# Altium PCB PCB1.PcbDoc
Units mil, origin at the board's own origin, x right, y up, seen from the top; angles counter-clockwise.
Board outline 2920.03 x 2075.03 mil, 2 copper layers (Top Layer, Bottom Layer); 23 components, 18 nets, 100 pads, 6 vias.
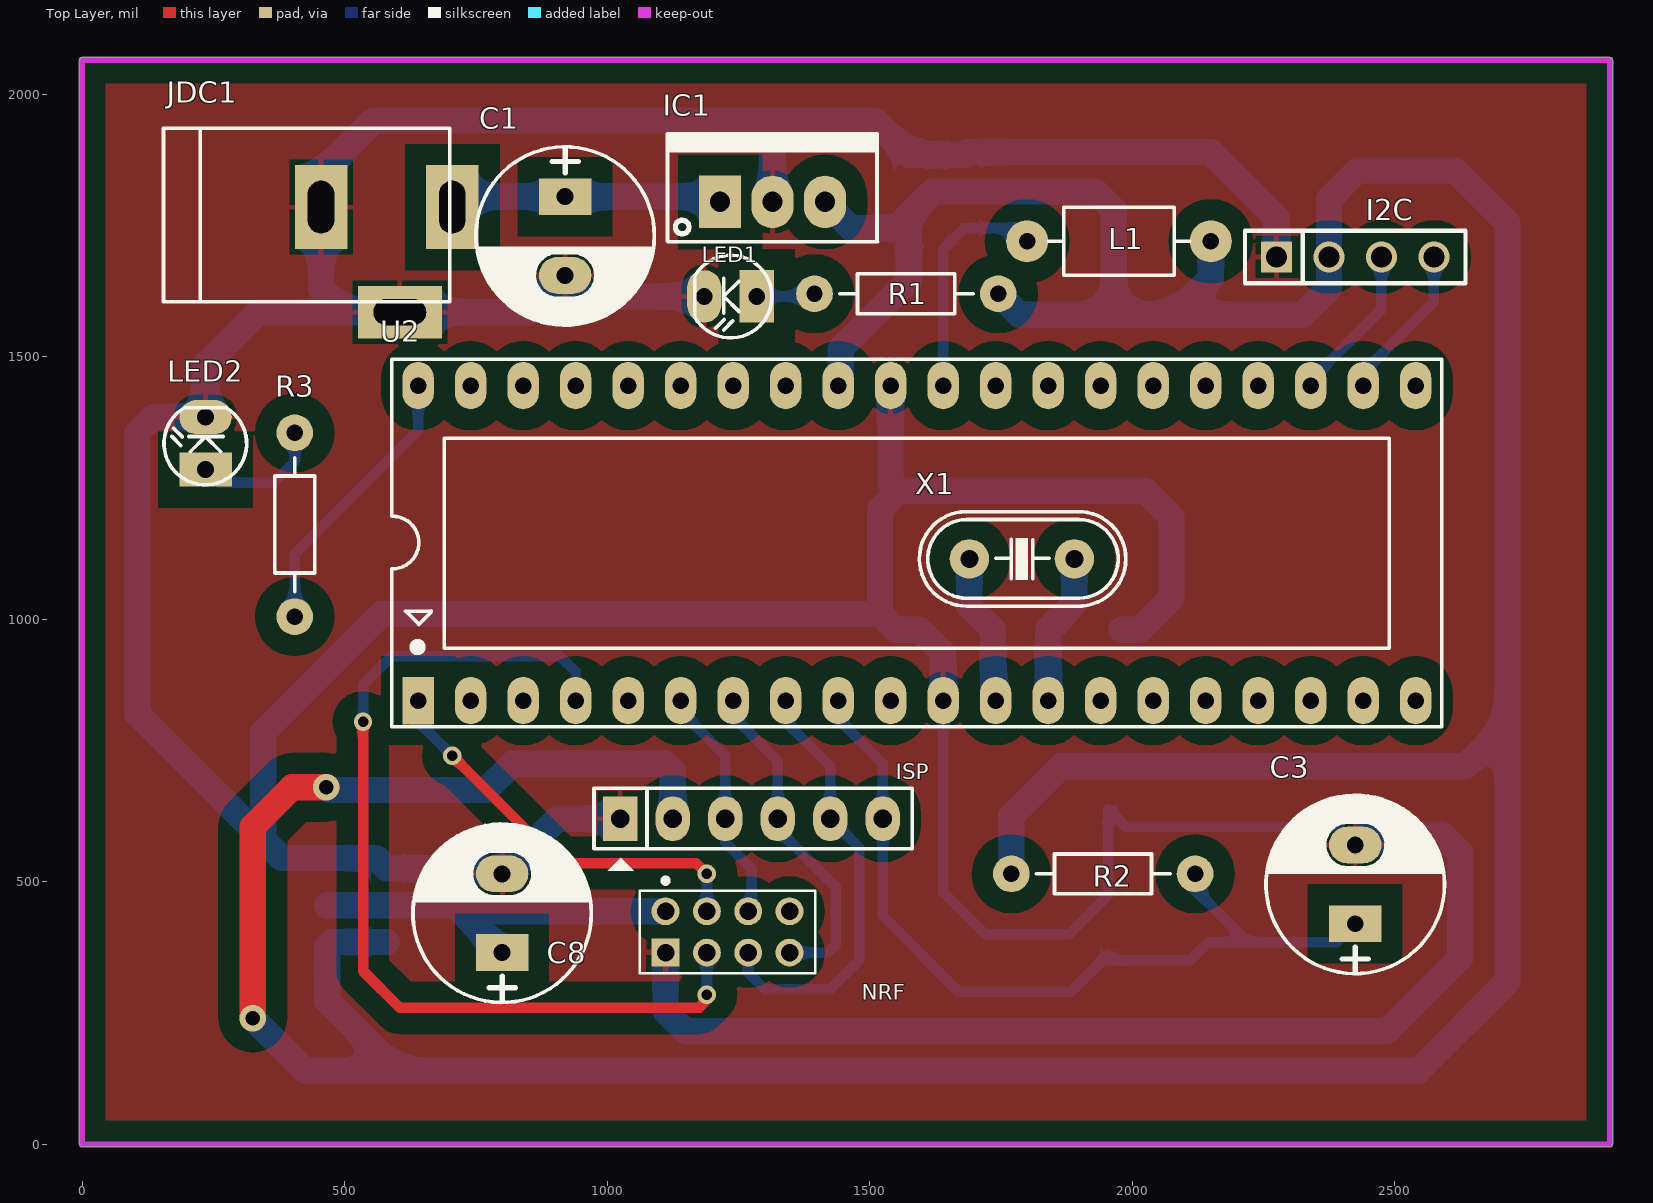
[diagram p0: Top Layer view]
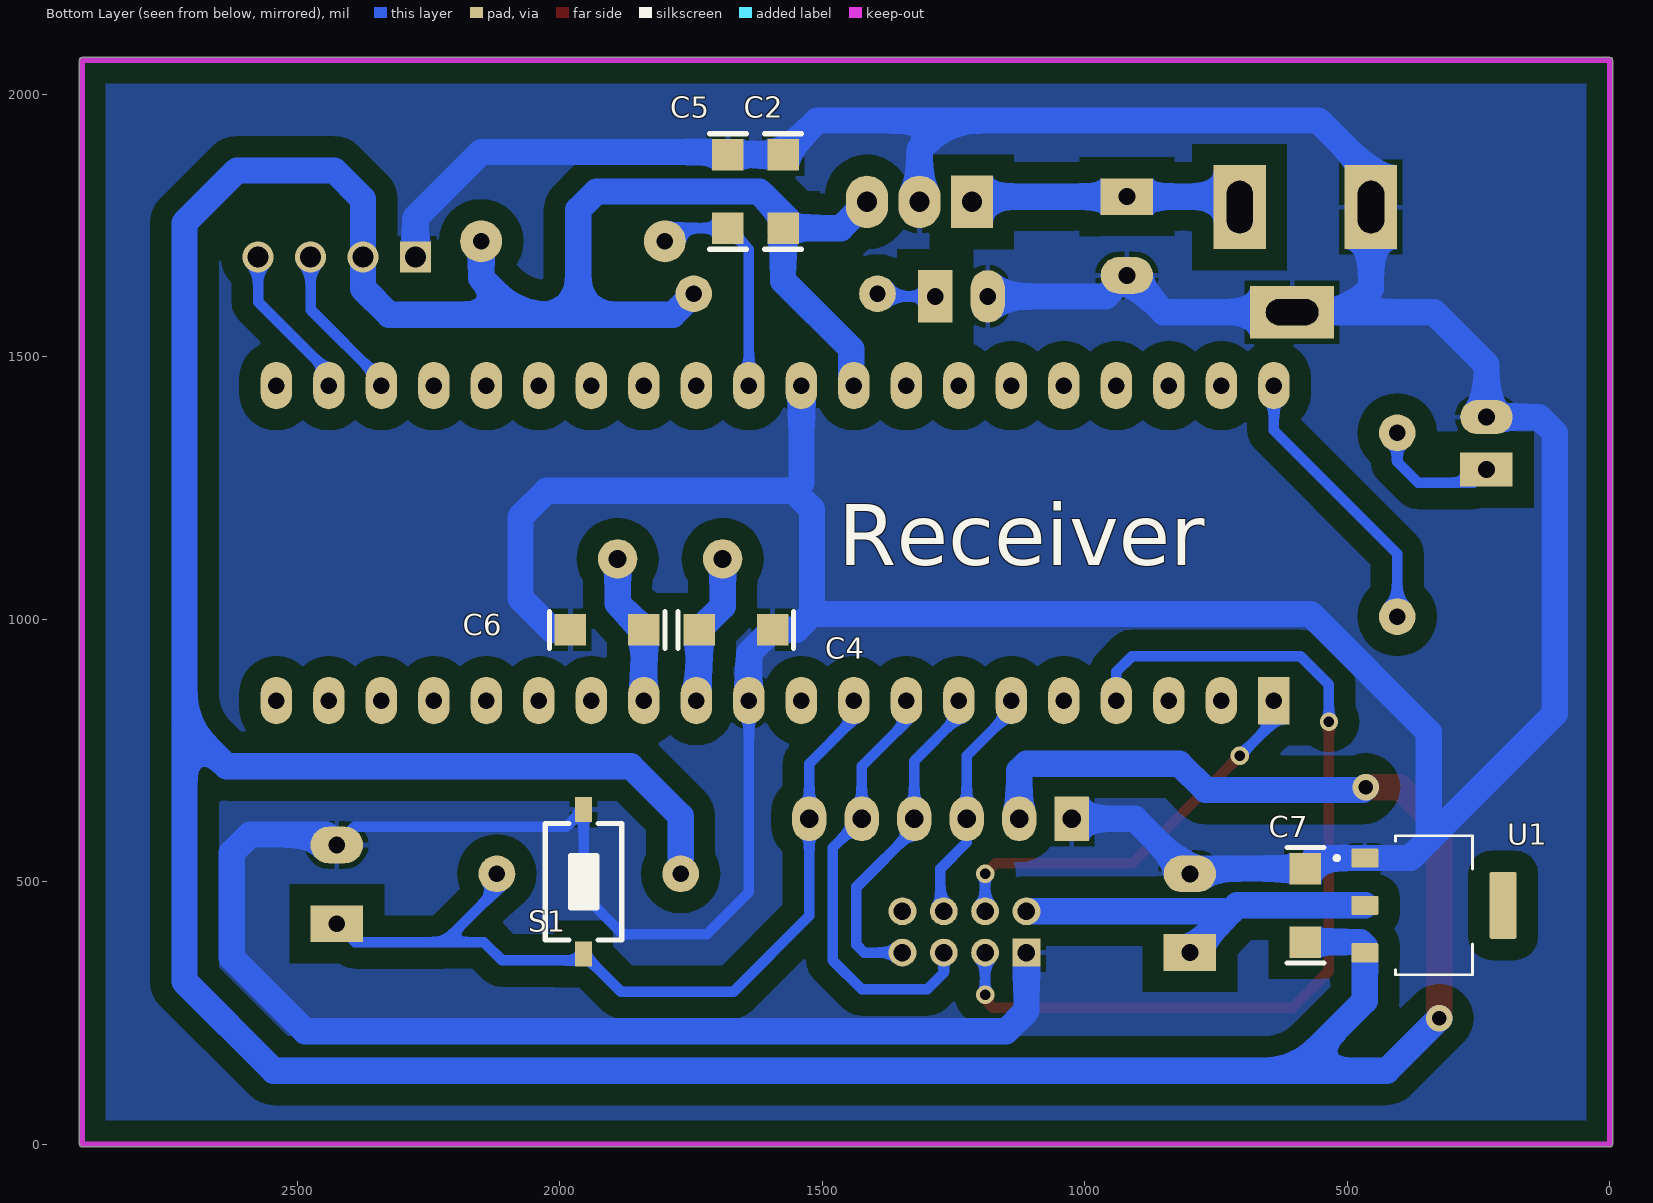
[diagram p1: Bottom Layer view, seen from below]
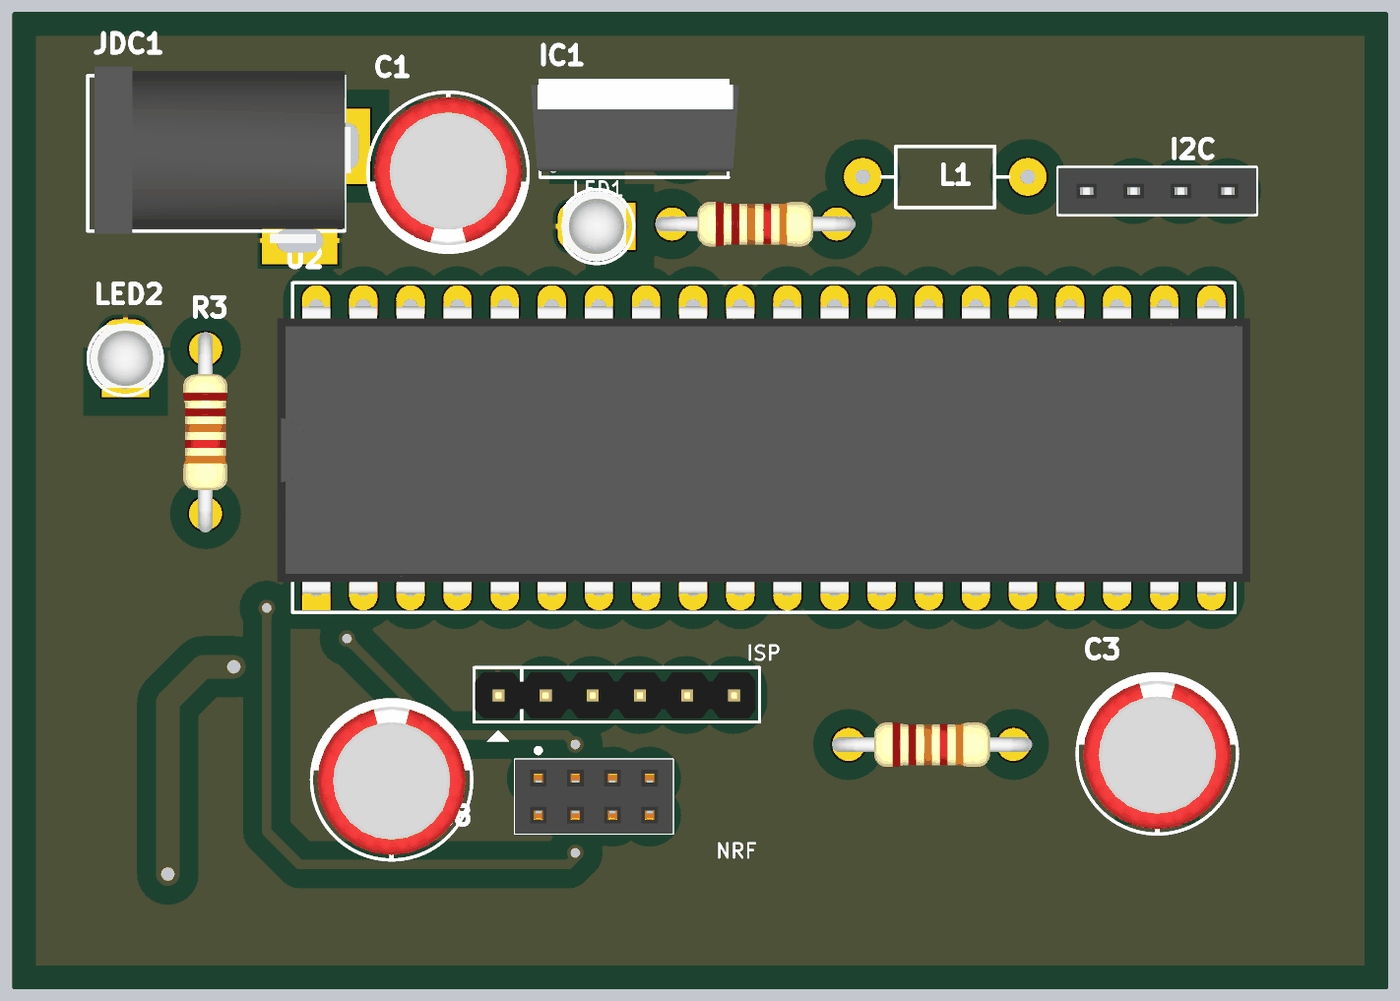
[diagram p2: 3D render of the assembled board from above, using the file's embedded part models]
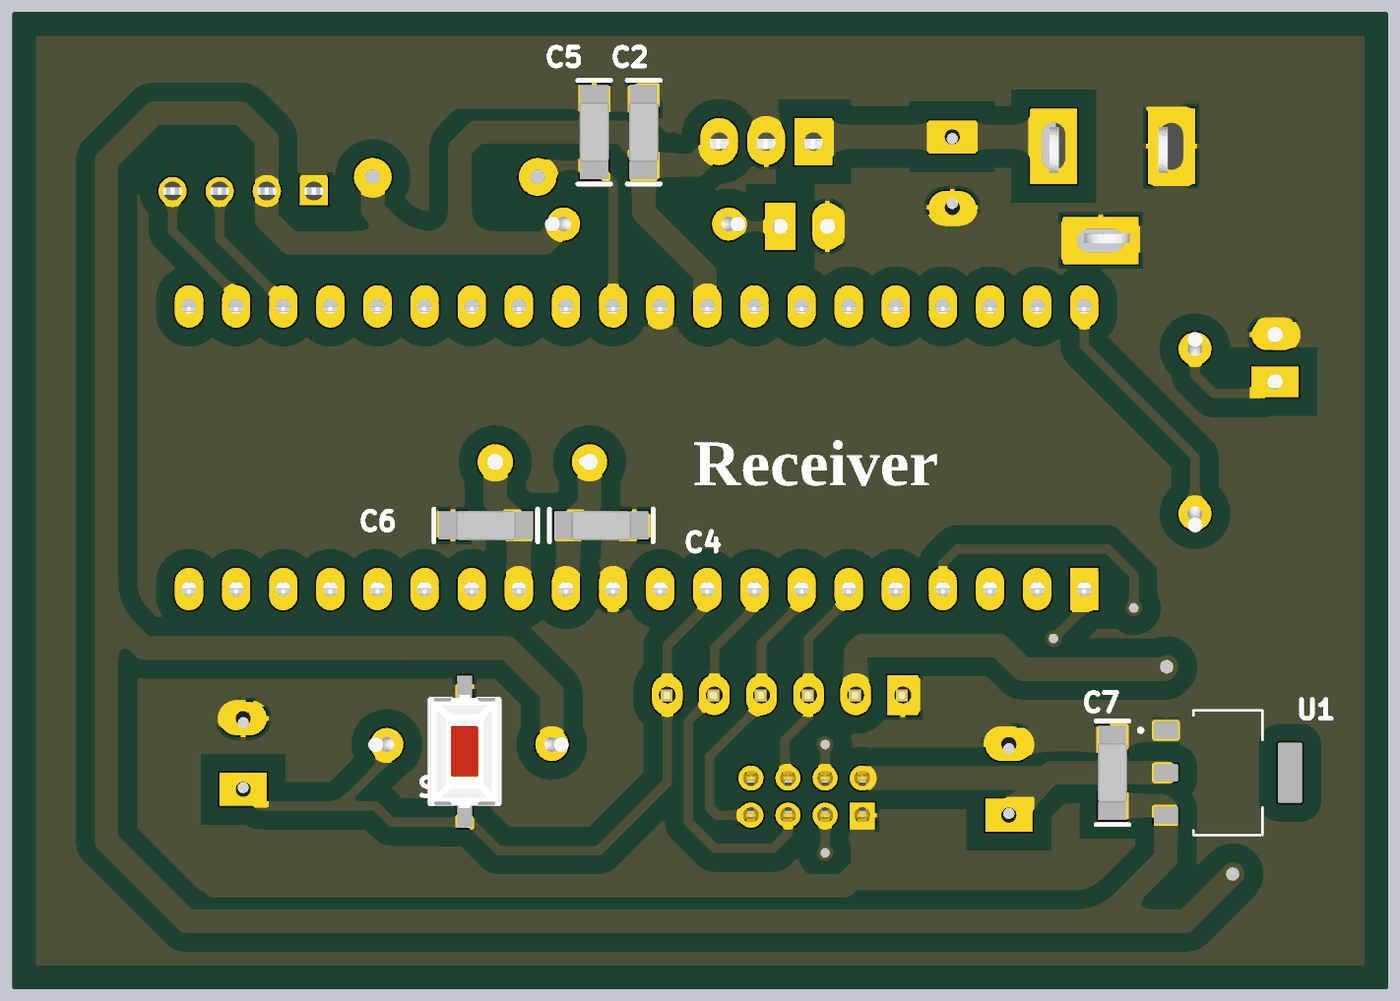
[diagram p3: 3D render of the assembled board from below, using the file's embedded part models]

## Layer stack, top to bottom
Top Solder: solder mask 0.4, Solder Resist, Dk 3.5
Top Layer: signal copper 1.4
Dielectric 1: dielectric 12.6, FR-4, Dk 4.8
Bottom Layer: signal copper 1.4
Bottom Solder: solder mask 0.4, Solder Resist, Dk 3.5

## Board outline
0,-5.02 cw(c0,0) -5.02,0 -5.02,2065 cw(c0,2065) 0,2070.02 2910,2070.02 cw(c2910,2065) 2915.02,2065 2915.02,0 cw(c2910,0) 2910,-5.02

## Design rules (kind name [scope] priority, off if disabled: settings)
Clearance [All] p1: gap=40 ignorepadtopadclearanceinfootprint=FALSE
PolygonConnect [All] p1: connectstyle=Relief reliefconductorwidth=10 reliefentries=4 polygonreliefangle="90 Angle" airgapwidth=10
RoutingVias [All] p1: holewidth=20 width=35 viastyle="Through Hole" minholewidth=15 minwidth=25 maxholewidth=28 maxwidth=50
SolderMaskExpansion [All] p1: expansion=4
Width [All] p1: maxlimit=50 minlimit=10 preferedwidth=20
30 further rules are at their usual default settings.

## Components (designator, comment, footprint, x,y, rotation, side; value= is the part's Value field where it differs from the comment)
C1 "1000uF" CP1.5/3.4 920,1805 r270 top value=1000uF/16V
C2 "0.1uF" C1206 1575,1815 r270 bottom
C3 "10uF" CP1.5/3.4 2425,420 r90 top value=1000uF/16V
C4 "22pF" C1206 1665,980 r0 bottom
C5 "100nF" C1206 1680,1815 r270 bottom
C6 "22pF" C1206 1910,980 r0 bottom
C7 "0.1uF" C1206 580,455 r270 bottom
C8 "47uF" CP1.5/3.4 800,365 r90 top value=1000uF/16V
I2C "JP4" JP4-C1T 2275,1690 r0 top (schematic designator I1)
IC1 "LM7805" QTO-220 1215,1795 r0 top
ISP "JP6 PIN" JP6 1025,620 r0 top value=JP7 (schematic designator ISP1)
JDC1 "Jac DC" DC-IN 580,1685 r0 top
L1 "10uH" L/0.4 2150,1720 r180 top value="150 mH"
LED1 "LED" LED-3 1285,1615 r180 top value="LED 3 ly Single Colour"
LED2 "LED" LED-3 235,1285 r90 top value="LED 3 ly Single Colour"
NRF "JP4x2-2.0" J4-C2T 1229.37,404.37 r0 top (schematic designator NRF1)
R1 "330" R1/4W 1745,1620 r180 top value="R1/4W - 1K"
R2 "330" R1/4W 2120,515 r180 top value="R1/4W - 1K"
R3 "330" R1/4W 405,1005 r90 top value="R1/4W - 1K"
S1 "SW-SMD" SW-SMD 1955,500 r90 bottom
U1 "AMS1117" SOT229P700X180-4N 335,455 r180 bottom
U2 "ATmega32A-PU" DIP40/W0.6 640,845 r0 top
X1 "16Mhz" XT2 1790,1115 r180 top value=4Mhz

## Footprints (in the part's own frame and the unit in brackets; to place one, negate y for a bottom-side part, rotate by r counter-clockwise, add the part's x,y. Pads: shape width x height; smd on the part's side, far side on the other; paste and mask are expansions set on the pad)
C1206 [mil]
  rect 60x60 smd: 1(-70,0) 2(70,0)
  silkscreen extent -110,-35 110,35, body extent -63,-35 63,35, height 40
CP1.5/3.4 [mil] "Tu hoa 220->470uF,16V, 470uF/16V,25V"
  rect 70x100 hole 32: 1(0,0)
  oval 70x100 hole 32: 2(150,0)
  silkscreen extent -95,-170 245,170, body extent -85,-157 230,157, height 446
DC-IN [mil] "Jac DC input"
  rect 100x160 hole 50 slot 100 at 90 deg: 1(125,100) 2(-125,100)
  rect 160x100 hole 50 slot 100 at 0 deg: 3(25,-100)
  silkscreen extent -425,-80 120,250, body extent -410,-105 134,269, height 434
DIP40/W0.6 [mil] "40 PIN, W 600mil, Pin to pin 100mil"
  rect 60x90 hole 31: 1(0,0)
  oval 60x90 hole 31: 2(100,0) 3(200,0) 4(300,0) 5(400,0) 6(500,0) 7(600,0) 8(700,0) 9(800,0) 10(900,0) 11(1000,0) 12(1100,0) 13(1200,0) 14(1300,0) 15(1400,0) 16(1500,0) 17(1600,0) 18(1700,0) 19(1800,0) 20(1900,0) 21(1900,600) 22(1800,600) 23(1700,600) 24(1600,600) 25(1500,600) 26(1400,600) 27(1300,600) 28(1200,600) 29(1100,600) 30(1000,600) 31(900,600) 32(800,600) 33(700,600) 34(600,600) 35(500,600) 36(400,600) 37(300,600) 38(200,600) 39(100,600) 40(0,600)
  silkscreen extent -50,-50 1950,650, body extent -82,-10 1982,600, height 224
J4-C2T [mm] "8 pins, dual row, straight, gold plating"
  rect 1.35x1.35 hole 0.85: 1(-3,-1)
  round 1.35 hole 0.85: 2(-1,-1) 3(1,-1) 4(3,-1) 5(3,1) 6(1,1) 7(-1,1) 8(-3,1)
  silkscreen extent -4.25,-2 4.25,2.61, body extent -4.25,-2 4.25,2, height 4.31
JP4-C1T [mm] "4 row, straight, gold plating"
  rect 1.52x1.52 hole 1.02: 1(0,0)
  round 1.52 hole 1.02: 2(2.54,0) 3(5.08,0) 4(7.62,0)
  silkscreen extent -1.52,-1.27 9.14,1.27, body extent -1.52,-1.25 9.14,1.25, height 8.51
JP6 [mil] "JP6"
  rect 65x85 hole 36: 1(0,0)
  oval 65x85 hole 36: 2(100,0) 3(200,0) 4(300,0) 5(400,0) 6(500,0)
  silkscreen extent -50,-99 556,58, body extent -48,-50 548,48, height 323
L/0.4 [mil] "Inductor , 2 Pin, L 350mil, W 150 mil"
  round 80 hole 31: 1(0,0) 2(350,0)
  silkscreen extent 40,-65 310,65
LED-3 [mil] "LED 2 PIN, 3ly Only colour"
  rect 65x100 hole 32: 1(0,0)
  oval 65x100 hole 32: 2(100,0)
  silkscreen extent -29,-78 118,79, body extent -13,-75 125,75, height 217
QTO-220 [mil] "TO-220 - 1-2-3"
  rect 80x100 hole 39: 1(0,0)
  oval 80x100 hole 39: 2(100,0) 3(200,0)
  silkscreen extent -100,-76 300,130, body extent -119,-64 322,121, height 755
R1/4W [mil] "R 1/4W, 2 Pin, 350mil"
  round 70 hole 31: 1(0,0) 2(350,0)
  silkscreen extent 48,-38 302,38, body extent -40,-47 386,47, height 111
SOT229P700X180-4N [mm]
  rrect15% 1.31x0.93 smd: 1(-3.345,2.29) 2(-3.345,0) 3(-3.345,-2.29)
  rrect15% 1.31x3.24 smd: 4(3.345,0)
  silkscreen extent -4.8,-3.36 1.86,3.36
SW-SMD [mm] "Switch SMD type"
  rect 1.2x0.8 smd: 1(-3.5,0) 2(3.5,0)
  silkscreen extent -2.82,-1.85 2.82,1.85, body extent -3.05,-1.85 3.05,1.85, height 2.5
XT2 [mil] "Footpin for Crystal 2 pin"
  round 75 hole 34: 1(-100,0) 2(100,0)
  silkscreen extent -198,-90 195,90, body extent -233,-93 213,90, height 138

## Part data
C1 C3 C8: library part CP4, "Cap 1000uF/16V - 220uF/50V", Description 1="2200uF-3300uF/6,3V - 1000uF-2200uF/10V", Description 2="1000uF/16V - 470uF => 1000uF/25V - 100uF/100V", Description 3=330uF>470uF/35V_220uF>470uF/50V_10uF>22uF/250V, Description 4="220uF => 330uF/63V - 10uF =>33uF/160 - 200V", Description 5="4,7uF>10uF/250V_3,3uF>10uF/400V - 2,2uF>4,7uF/450V"
C2 C4 C5 C6 C7: library part "Cap SMD 1206"
I2C: "WR-PHD 2.54 mm Angled Socket Header", Manufacturer="Würth Elektronik eiSos GmbH", partNo=613004143121, ComponentLink1 Description=Manufacturer, ComponentLink1URL=http://www.we-online.com, ComponentLink2 Description=Datasheet, ComponentLink2URL=http://katalog.we-online.de/em/datasheet/6130xx143121.pdf, Created by="Karrer Zheng", Created Date="29 March 2013", NoPins=04
IC1: library part LM78xx, "On ap +, from + 5 to + 24VDC", =LM7808
ISP: library part JP6
JDC1: library part DCIN, "Jac DC input"
L1: library part L1, "Inductor"
LED1 LED2: "LED Single colour Green and Red"
NRF: "WR-PHD 2.00 mm Dual Pin Header", Manufacturer="Würth Elektronik eiSos GmbH", partNo=62000821121, ComponentLink1 Description=Manufacturer, ComponentLink1URL=http://www.we-online.com, ComponentLink2 Description=Datasheet, ComponentLink2URL=http://katalog.we-online.de/em/datasheet/6200xx21121.pdf, Created by="Karrer Zheng", Created Date="2 April 2013", NoPins=08
R1 R2 R3: library part R1/4W, "Resistor 1/4W"
S1: "Switch", LatestRevisionDate=17-Jul-2002, LatestRevisionNote="Re-released for DXP Platform.", PackageReference=SPST-2, Published=24-Mar-1999, Publisher="Altium Limited"
U1: "UNO PLUS Arduino R3 Shield, Xbee Arduino IDE Wheeled Robotics Kit", Package="SOT-223 Seeed Technology", Availability=Unavailable, MF="Seeed Technology", MP=AMS1117, Price=None, SnapEDA_Link=https://www.snapeda.com/parts/AMS1117/Seeed%20Technology%20Co.%2C%20Ltd/view-part/184428/?ref=snap
U2: "8-Bit AVR Microcontroller with 32K Bytes of In-System Programmable Flash Memory", Supplier Part Number 1=ATMEGA32-16PC-ND, Code_JEDEC=MS-011-AC, ComponentLink1Description=Datasheet, ComponentLink1URL=http://www.atmel.com/dyn/resources/prod_documents/doc2503.pdf, ComponentLink2Description="Atmel.com Home", ComponentLink2URL=http://www.atmel.com, DatasheetVersion=2503C-AVR-10/02, PackageDescription="40-lead (0.600\"/15.24mm Wide) Plastic Dual Inline Package (PDIP)", PackageReference=40P6, PackageVersion="revB, Sep-2001", Published=17-Sep-2003, Publisher="Altium Limited", Supplier 1=Digi-Key, Supplier 2=Mouser, Supplier Part Number 2=556-ATMEGA32-16PC
X1: library part XT2, "Crystal For all Crystal 2pin."

## Via types
v1: diameter 35, hole 20, Top Layer to Bottom Layer, tented both sides, 4 vias
v2: diameter 50, hole 28, Top Layer to Bottom Layer, tented both sides, 2 vias

## Nets (pads, with @x,y where several pads share a name; then routed paths per layer and width w, separated by ;. In a path a pad name is that pad's centre, name@x,y a point inside that pad or via, vN(x,y) a via of type N, cw(c..) or ccw(c..) an arc to the next point about the centre after c; other vN are vias at no path point)
+3.3V: C8.1 NRF.8 U1.2 | length 760.6
  Bottom Layer w50: U1.2 710,455 721.26,443.74 ; C8.1 721.26,443.74 ; NRF.8 721.26,443.74
+5V: C2.2 C7.2 I2C.2 IC1.3 ISP.2 L1.1 R1.1 R2.2 U1.3 U2.32 | length 9394
  Top Layer w50: v2(325,240) 325,605 400,680 v2(465,680)
  Bottom Layer w50: v2(325,240) 425,140 600,140 ; v2(465,680) 470,675 770,675 820,725 1111.26,725 1125,711.26 ISP.2 ; C7.2 475,385 466.69,376.69 U1.3 466.69,273.31 600,140 ; IC1.3 1465,1745 C2.2 ; U2.32 1445,1450 1445,1515 1575,1645 C2.2 ; R1.1 1785,1580 1965,1580 ; R2.2 1770,625 1865,720 2635,720 2715,800 ; L1.1 2150,1650 2080,1580 ; 600,140 2545,140 2715,310 2715,800 ; C2.2 1575,1770 1620,1815 1930,1815 1965,1780 1965,1580 ; 1965,1580 2080,1580 ; 2080,1580 2325,1580 2375,1630 I2C.2 2375,1800 2430,1855 2615,1855 2715,1755 2715,800
AVCC: C5.2 L1.2 U2.30 | length 446.9
  Bottom Layer w20: U2.30 1640,1705 C5.2 1775,1745 L1.2
CE: NRF.2 U2.4 | length 1820.4
  Top Layer w20: v1(535,805) 535,330 605,260 1175,260 1190,275 v1(1190,285)
  Bottom Layer w20: v1(535,805) 535,875 590,930 910,930 940,900 U2.4 ; v1(1190,285) NRF.2
CSN: NRF.7 U2.1 | length 781.4
  Top Layer w20: v1(705,740) 910,535 1170,535 v1(1190,515)
  Bottom Layer w20: U2.1 640,805 v1(705,740) ; NRF.7 v1(1190,515)
GND: C1.2 C2.1 C3.2 C4.1 C5.1 C6.2 C7.1 C8.2 I2C.1 IC1.2 ISP.1 JDC1.2 JDC1.3 LED1.2 LED2.2 NRF.1 S1.2 U1.1 U2.11 U2.31 | length 11895.3
  Bottom Layer w20: U2.11 1640,480 1720,400 1880,400 1955,475 S1.2 1987.8,605 2390,605 C3.2
  Bottom Layer w50: ISP.1 905,620 C8.2 790,525 C7.1 559.84,545.16 U1.1 379.84,545.16 345,580 ; NRF.1 1111.26,253.74 1150,215 2485,215 2625,355 2625,555 2590,590 2445,590 C3.2 ; LED1.2 960,1615 C1.2 850,1585 JDC1.3 500,1585 ; IC1.2 1315,1895 1260,1950 ; U2.31 1540,1260 1555,1245 ; U2.11 1640,935 C4.1 1550,980 1520,1010 ; C6.2 2015,980 2075,1040 2075,1195 2025,1245 1555,1245 ; I2C.1 2275,1765 2150,1890 1685,1890 C5.1 C2.1 1510,1950 1260,1950 ; 345,580 105,820 105,1355 135,1385 LED2.2 235,1485 335,1585 500,1585 ; 345,580 345,785 570,1010 1520,1010 ; 500,1585 455,1630 JDC1.2 455,1850 555,1950 1260,1950 ; 1520,1010 1520,1210 1555,1245
Led: R3.1 U2.40 | length 537.3
  Bottom Layer w20: R3.1 405,1125 640,1360 U2.40
MISO: ISP.4 NRF.4 U2.7 | length 639.5
  Bottom Layer w20: U2.7 1240,815 1325,730 ISP.4 1325,600 1435,490 1435,380 1420,365 NRF.4
MOSI: ISP.3 NRF.6 U2.6 | length 459.8
  Bottom Layer w20: U2.6 1140,825 1225,740 ISP.3 1225,575 1275,525 1275,450 NRF.6
NetC1_1: C1.1 IC1.1 JDC1.1 | length 522.4
  Bottom Layer w50: JDC1.1 725,1805 C1.1 1205,1805 IC1.1
NetLED1_1: LED1.1 R1.2 | length 112.1
  Bottom Layer w20: LED1.1 1390,1615 R1.2
NetLED2_1: LED2.1 R3.2 | length 251.9
  Bottom Layer w20: LED2.1 260,1260 365,1260 405,1300 R3.2
RESET: C3.1 ISP.6 R2.1 S1.1 U2.9 | length 1640.6
  Bottom Layer w20: U2.9 1440,810 1525,725 ISP.6 1525,435 1670,290 1882.8,290 S1.1 1967.2,350 2110,350 2145,385 2220,385 ; R2.1 2120,485 2220,385 ; C3.1 2390,385 2220,385
SCK: ISP.5 NRF.3 U2.8 | length 838.7
  Bottom Layer w20: NRF.3 1268.74,326.26 1300,295 1425,295 1480,350 1480,565 ISP.5 1425,720 1340,805 U2.8
SCL: I2C.4 U2.22 | length 300.9
  Bottom Layer w20: U2.22 2440,1470 2575,1605 I2C.4
SDA: I2C.3 U2.23 | length 300.9
  Bottom Layer w20: U2.23 2340,1455 2475,1590 I2C.3
XTAL1: C6.1 U2.13 X1.1 | length 290.7
  Bottom Layer w50: U2.13 C6.1 1890,1030 X1.1
XTAL2: C4.2 U2.12 X1.2 | length 290.7
  Bottom Layer w50: X1.2 1690,1025 C4.2 1735,850 U2.12
pads on no net: NRF.5 U1.4 U2.2 U2.3 U2.5 U2.10 U2.14 U2.15 U2.16 U2.17 U2.18 U2.19 U2.20 U2.21 U2.24 U2.25 U2.26 U2.27 U2.28 U2.29 U2.33 U2.34 U2.35 U2.36 U2.37 U2.38 U2.39

## Polygon pours and split planes (outlines as drawn)
GND on Bottom Layer "GND_L02_P004" (solid, remove dead copper, pour order 4): 0,2065 0,0 2910,0 2910,2065
GND on Top Layer "GND_L01_P006" (solid, remove dead copper, pour order 6): 0,2065 0,0 2910,0 2910,2065

## Keep-outs
Keep-Out Layer:
  lines w10: 0,0 0,2065 2910,2065 2910,0 0,0

## Silkscreen, mask and mechanical layers (free items; w line width, h text height)
Bottom Overlay:
  text "Receiver" at 1470,1065 h200